# Altium PCB RS232_M_V1.PcbDoc
Units mm, origin at the board's own origin, x right, y up, seen from the top; angles counter-clockwise.
Board outline 13.93 x 19 mm, 2 copper layers (Top Layer, Bottom Layer); 11 components, 18 nets, 60 pads, 5 vias.
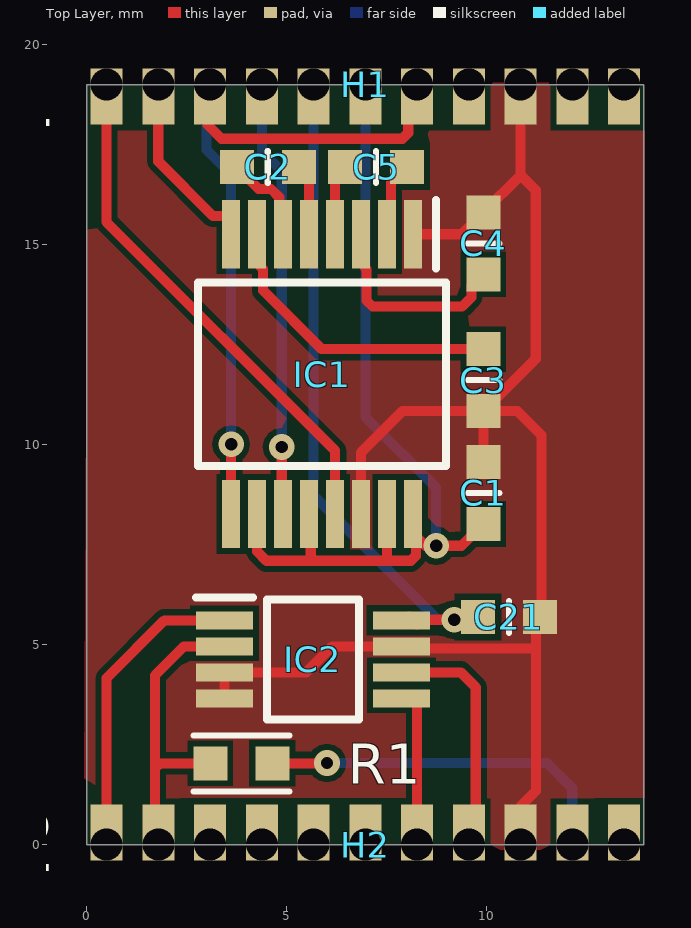
[diagram p0: Top Layer view]
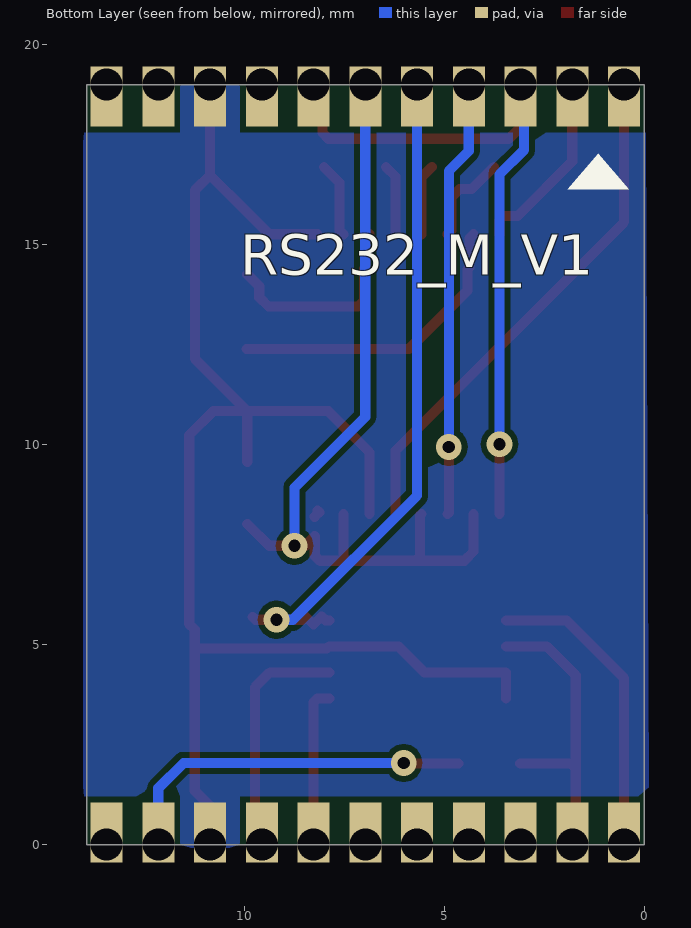
[diagram p1: Bottom Layer view, seen from below]
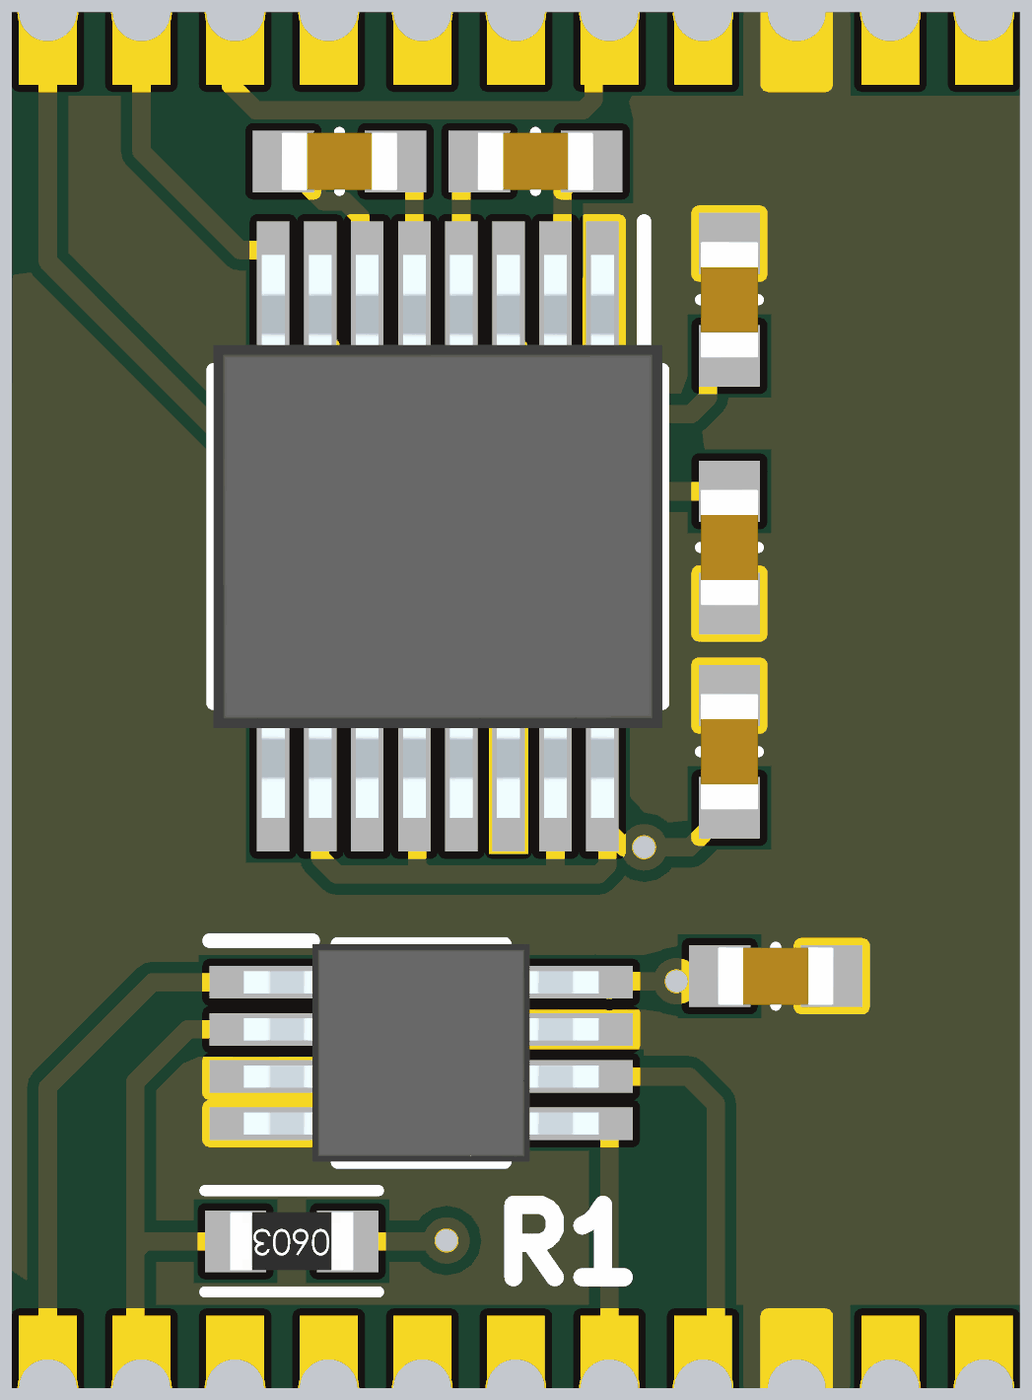
[diagram p2: 3D render of the assembled board from above, using the file's embedded part models]

## Layer stack, top to bottom
Top Solder: solder mask 0.0102, Solder Resist, Dk 3.5
Top Layer: signal copper 0.0356
Dielectric 1: dielectric 0.32, FR-4, Dk 4.8
Bottom Layer: signal copper 0.0356
Bottom Solder: solder mask 0.0102, Solder Resist, Dk 3.5

## Board outline
0,0 0,19 13.934,19 13.934,0

## Design rules (kind name [scope] priority, off if disabled: settings)
AssemblyTestPointUsage SilkToBoardRegionClearance_1 [All] p2:
AssemblyTestPointUsage SilkToBoardRegionClearance [All] p3:
Clearance [All] p1: gap=0.152 ignorepadtopadclearanceinfootprint=FALSE except(0: Arc-Hole Track-Hole SMDPad-Hole THPad-Hole Via-Hole Fill-Hole Poly-Hole Region-Hole Text-Hole)
HoleSize [All] p1: absolutevalues=TRUE maxlimit=6.35 minlimit=0.3 maxpercent=80.000 minpercent=20.000
MatchedLengths DiffPair_DIFF100MatchedLengths [InDifferentialPairClass('DIFF100')] p1: tolerance=0.152 checknetsindiffpair=TRUE checkdiffpairvsdiffpair=FALSE checkxsignals=FALSE checkothers=FALSE usedelayunits=FALSE
MinimumSolderMaskSliver [All] p1: minsoldermaskwidth=0.1
MinimumSolderMaskSliver SilkscreenOverComponentPads_2 [All] p2: minsoldermaskwidth=0.254
MinimumSolderMaskSliver SilkToSolderMaskClearance_1 [IsPad] p3: minsoldermaskwidth=0.254
MinimumSolderMaskSliver SilkscreenOverComponentPads_1 [All] p4: minsoldermaskwidth=0.254
MinimumSolderMaskSliver SilkToSolderMaskClearance [IsPad] p5: minsoldermaskwidth=0.254
MinimumSolderMaskSliver SilkscreenOverComponentPads [All] p6: minsoldermaskwidth=0.254
PolygonConnect [All] p1: connectstyle=Direct reliefconductorwidth=0.254 reliefentries=4 polygonreliefangle="90 Angle" airgapwidth=0.254
RoomDefinition RS232_M_V1 [InComponentClass('RS232_M_V1')] p1: confinementstyle=ConfineIn formatcopy=TRUE lockcomponents=FALSE outline -0.17,-0.68 14.24,-0.68 14.24,19.61 -0.17,19.61
RoutingVias [All] p1: holewidth=0.305 width=0.635 viastyle="Through Hole" minholewidth=0.305 minwidth=0.635 maxholewidth=0.711 maxwidth=1.27
SilkToBoardRegionClearance SilkToBoardRegionClearance_2 [All] p1:
SilkToSolderMaskClearance SilkToSolderMaskClearance_2 [IsPad] p1: minsilkscreentomaskgap=0.254 clearancetoexposedcopper=TRUE
SolderMaskExpansion [All] p1: expansion=0.102
Width [All] p1: maxlimit=2.54 minlimit=0.152 preferedwidth=0.254
26 further rules are at their usual default settings.

## Components (designator, comment, footprint, x,y, rotation, side; value= is the part's Value field where it differs from the comment)
C1 "0.10µF" SMD-0603C 9.92,8.79 r180 top
C2 "0.10µF" SMD-0603C 4.53,16.94 r270 top
C3 "0.10µF" SMD-0603C 9.92,11.61 r0 top
C4 "0.10µF" SMD-0603C 9.92,15.03 r180 top
C5 "0.10µF" SMD-0603C 7.24,16.94 r270 top
C21 "0.10µF" SMD-0603C 10.56,5.69 r90 top
H1 "CASTELLATED 11 pin" "CASTELLATED 11 pin" 13.438,19 r180 top locked
H2 "CASTELLATED 11 pin" "CASTELLATED 11 pin" 0.5,0 r0 top locked
IC1 "MAX3221ECAE+" SOP65P778X199-16N 5.89,11.76 r270 top
IC2 "MAX11612EUA+" SOP65P490X110-8N 5.66,4.63 r0 top
R1 "33" SMD-0603-RES 3.87,2.03 r90 top

## Footprints (in the part's own frame and the unit in brackets; to place one, negate y for a bottom-side part, rotate by r counter-clockwise, add the part's x,y. Pads: shape width x height; smd on the part's side, far side on the other; paste and mask are expansions set on the pad)
"CASTELLATED 11 pin" [mm]
  rect 0.8x1.4 / inner rect 0.8x1.5 / far side rect 0.8x1.5 hole 0.8 copper offset 0,0.3: 1(0,0) 2(1.294,0) 3(2.587,0) 4(3.881,0) 5(5.175,0) 6(6.469,0) 7(7.762,0) 8(9.056,0) 9(10.35,0) 10(11.644,0) 11(12.938,0)
SMD-0603-RES [mm]
  rect 0.85x0.85 smd: 1(0,0.775) 2(0,-0.775)
  silkscreen extent -0.7,-1.2 0.7,1.2, body extent -0.4,-0.85 0.4,0.85, height 0.56
SMD-0603C [mm]
  rect 0.85x0.85 smd: 1(0,0.775) 2(0,-0.775)
  silkscreen extent -0.4,0 0.4,0, body extent -0.4,-0.8 0.4,0.8, height 0.9
SOP65P490X110-8N [mm]
  rect 1.425x0.45 smd: 1(-2.212,0.975) 2(-2.212,0.325) 3(-2.212,-0.325) 4(-2.212,-0.975) 5(2.212,-0.975) 6(2.212,-0.325) 7(2.212,0.325) 8(2.212,0.975)
  silkscreen extent -2.93,-1.5 1.15,1.55, body extent -2.45,-1.5 2.45,1.5, height 1.1
SOP65P778X199-16N [mm]
  rect 1.705x0.45 smd: 1(-3.498,2.275) 2(-3.498,1.625) 3(-3.498,0.975) 4(-3.498,0.325) 5(-3.498,-0.325) 6(-3.498,-0.975) 7(-3.498,-1.625) 8(-3.498,-2.275) 9(3.498,-2.275) 10(3.498,-1.625) 11(3.498,-0.975) 12(3.498,-0.325) 13(3.498,0.325) 14(3.498,0.975) 15(3.498,1.625) 16(3.498,2.275)
  silkscreen extent -4.35,-3.1 2.29,3.1, body extent -3.89,-3.1 3.89,3.1, height 1.99

## Part data
C1 C2 C3 C4 C5 C21: library part GCJ188R72A104KA01D, "CAP CER 0.1UF 100V X7R 0603", Digi-Key Part Number=490-13420-1-ND, Manufacturer="Murata Electronics North America", Operating Temperature="-55°C ~ 125°C", Package / Case="0603 (1608 Metric)", Ratings=AEC-Q200, Supplier Part Number 1=81-GCJ188R72A104KA1D, Temperature Coefficient=X7R, Tolerance=±10%, Voltage=100V, @ qty=0, Applications="Automotive, Boardflex Sensitive", Datasheets=http://www.murata.com/~/media/webrenewal/support/library/catalog/products/capacitor/mlcc/c03e.ashx, Factory Stock=0, Features="Soft Termination", Height - Seated (Max)=-, Image=//media.digikey.com/Renders/Murata%20Renders/0603%28LQG18%29.jpg, Lead Spacing=-, Lead Style=-, Minimum Quantity=1, Mounting Type="Surface Mount, MLCC", Packaging="Cut Tape (CT)", Part Number=GCJ188R72A104KA01D, Part Status=Active, Quantity Available=2728, Series=GCJ, Size / Dimension="0.063\" L x 0.031\" W (1.60mm x 0.80mm)", Supplier 1=Mouser, Thickness (Max)="0.035\" (0.90mm)", Unit Price (USD)=0,23
IC1: "Integrated Circuit", Manufacturer_Name="Maxim Integrated", Supplier Part Number 1=700-MAX3221ECAE, Datasheet Link=http://datasheets.maximintegrated.com/en/ds/MAX3221E-MAX3243E.pdf, Height=1.99mm, Manufacturer_Part_Number=MAX3221ECAE+, Supplier 1=Mouser
IC2: "Integrated Circuit", Supplier Part Number 1=700-MAX11612EUA, Supplier 1=Mouser
R1: library part ERJ-3EKF33R0V, "RES SMD 33 OHM 1% 1/10W 0603", Digi-Key Part Number=P33.0HCT-ND, Manufacturer="Panasonic Electronic Components", Operating Temperature="-55°C ~ 155°C", Package / Case="0603 (1608 Metric)", Power (Watts)="0.1W, 1/10W", Supplier Device Package=0603, Supplier Part Number 1=667-ERJ-3EKF33R0V, Temperature Coefficient=±100ppm/°C, Tolerance=±1%, @ qty=1500, Composition="Thick Film", Datasheets=http://industrial.panasonic.com/www-cgi/jvcr13pz.cgi?E+PZ+3+AOA0002+ERJ3EKF33R0V+7+WW, Factory Stock=0, Failure Rate=-, Features="Automotive AEC-Q200", Height - Seated (Max)="0.022\" (0.55mm)", Image=//media.digikey.com/Photos/Panasonic%20Photos/MFG_ERJ-P6W%20Series.jpg, Minimum Quantity=1, Number of Terminations=2, Packaging="Cut Tape (CT)", Part Number=ERJ-3EKF33R0V, Part Status=Active, Quantity Available=1306721, Series=ERJ, Size / Dimension="0.063\" L x 0.031\" W (1.60mm x 0.80mm)", Supplier 1=Mouser, Unit Price (USD)=0.00379

## Via types
v1: diameter 0.64, hole 0.31, Top Layer to Bottom Layer, tented both sides, 5 vias

## Nets (pads, with @x,y where several pads share a name; then routed paths per layer and width w, separated by ;. In a path a pad name is that pad's centre, name@x,y a point inside that pad or via, vN(x,y) a via of type N, cw(c..) or ccw(c..) an arc to the next point about the centre after c; other vN are vias at no path point)
ADC0: H2.1 IC2.1 | length 7.7
  Top Layer w0.254: H2.1 0.5,4.16 1.945,5.605 IC2.1
ADC1: H2.2 IC2.2 R1.1 | length 7.7
  Top Layer w0.254: H2.2 1.71,0.084 1.71,1.9 ; R1.1 1.84,2.03 1.71,1.9 ; IC2.2 2.435,4.955 1.71,4.23 1.71,1.9
ADC4: H1.5 H1.9 IC1.9 | length 18.6
  Top Layer w0.254: H1.9 3.03,18.942 3.03,17.99 3.376,17.644 7.894,17.644 8.041,17.791 8.041,18.778 H1.5 ; v1@3.59,10.03 v1(3.615,10.005) IC1.9
  Bottom Layer w0.254: H1.9 3,18.912 3,17.37 3.615,16.755 v1(3.615,10.005)
D1: H2.10 R1.2 | length 9.2
  Top Layer w0.254: R1.2 6,2.03 v1(6.01,2.04)
  Bottom Layer w0.254: v1(6.01,2.04) 11.51,2.04 12.144,1.406 H2.10
GND: C1.2 C3.2 C4.2 C21.2 H1.3 H2.9 IC1.1 IC1.14 IC2.3 IC2.4 IC2.7 | length 39.3
  Top Layer w0.254: IC2.4 IC2.3 5.495,4.305 6.145,4.955 IC2.7 7.926,4.901 11.235,4.901 ; IC1.14 6.865,9.805 7.895,10.835 C3.2 ; IC1.1 9.373,15.258 C4.2 10.851,16.736 ; C1.2 C3.2 ; H2.9 10.85,0.96 11.235,1.345 11.235,4.901 ; H1.3 10.851,16.736 ; C3.2 10.775,10.835 11.37,10.24 11.37,5.51 11.235,5.375 11.235,4.901 ; C3.2 11.23,12.145 11.23,16.357 10.851,16.736
I2C1_CLK: H2.7 IC2.5 | length 4
  Top Layer w0.254: IC2.5 8.164,3.655 8.262,3.557 H2.7
I2C1_SDA: H2.8 IC2.6 | length 6
  Top Layer w0.254: IC2.6 9.355,4.305 9.73,3.93 9.73,0.174 H2.8
NetC2_1: C2.1 IC1.5 | length 1.8
  Top Layer w0.254: C2.1 5.565,16.68 IC1.5
NetC2_2: C2.2 IC1.6 | length 2.3
  Top Layer w0.254: C2.2 4.305,16.39 4.61,16.39 4.817,16.183 4.817,15.356 IC1.6
NetC3_1: C3.1 IC1.7 | length 7.6
  Top Layer w0.254: IC1.7 4.363,15.16 4.363,14.431 4.411,14.384 4.411,13.855 5.881,12.385 C3.1@9.94,12.385
NetC4_1: C4.1 IC1.3 | length 5.2
  Top Layer w0.254: IC1.3 6.963,15.16 6.963,14.421 7,14.384 7,13.599 7.149,13.45 9.39,13.45 9.622,13.682 9.622,13.957 C4.1
NetC5_1: C5.1 IC1.2 | length 1.9
  Top Layer w0.254: IC1.2 7.613,15.356 7.613,16.548 C5.1@8.005,16.94
NetC5_2: C5.2 IC1.4 | length 1.8
  Top Layer w0.254: IC1.4 6.215,16.7 C5.2@6.455,16.94
RS232_RX: H1.10 IC1.8 | length 4.7
  Top Layer w0.254: H1.10 1.794,17.079 3.158,15.715 3.517,15.715 3.615,15.617 IC1.8
RS232_TX: H1.11 IC1.13 | length 13.1
  Top Layer w0.254: H1.11 0.5,15.56 6.215,9.845 IC1.13
UART2_1: H1.8 IC1.11 | length 11
  Top Layer w0.254: v1(4.88,9.94) 4.88,8.297 IC1.11
  Bottom Layer w0.254: H1.8 4.382,17.338 4.88,16.84 v1(4.88,9.94)
VCC2: C1.1 H1.6 IC1.10 IC1.12 IC1.15 IC1.16 | length 22.5
  Top Layer w0.254: IC1.10 4.265,7.325 4.495,7.095 5.705,7.095 ; IC1.12 5.606,8.221 5.606,7.194 5.705,7.095 ; IC1.15 7.515,7.095 ; IC1.16@8.232,8.195 IC1.16 ; C1.1 9.375,7.47 v1(8.74,7.47) 8.47,7.47 8.232,7.708 8.232,7.221 8.106,7.095 7.515,7.095 ; 5.705,7.095 7.515,7.095 ; IC1.16 8.165,8.352 8.12,8.307 IC1.16
  Bottom Layer w0.254: H1.6 6.97,10.69 8.74,8.92 v1(8.74,7.47)
VCC3: C21.1 H1.7 IC2.8 | length 17.3
  Top Layer w0.254: IC2.8 7.962,5.605 8.06,5.703 8.263,5.5 8.453,5.69 8.523,5.62 v1(9.19,5.62) 9.715,5.62 C21.1
  Bottom Layer w0.254: H1.7 5.676,8.724 8.78,5.62 v1(9.19,5.62)
pads on no net: H1.1 H1.2 H1.4 H2.3 H2.4 H2.5 H2.6 H2.11

## Polygon pours and split planes (outlines as drawn)
GND on Bottom Layer "GND_L02_P006" (solid, pour order 6): -0.04,19.01 13.94,19.01 14.02,18.93 14.02,-0.08 0.01,-0.08 -0.12,-0.21
no net on Bottom Layer "NONET_L02_P000" (solid, pour order 0): 0.254,18.161
GND on Top Layer "GND_L01_P004" (solid, pour order 4): 0.03,19.05 13.96,19.05 13.96,0 14,-0.04 13.91,-0.13 -0.06,-0.13

## Silkscreen, mask and mechanical layers (free items; w line width, h text height)
Bottom Overlay:
  region: 1.143,17.272 0.381,16.383 1.905,16.383
  text "RS232_M_V1" at 10.09,14.25 h1
Mechanical 1:
  pour cut-out: 5.339,12.008
  lines w0.2: 13.934,0 13.934,19 ; 13.934,0 0,0 0,19 13.934,19